# EAGLE board DanielKnapp-th (EAGLE 7.2.0)
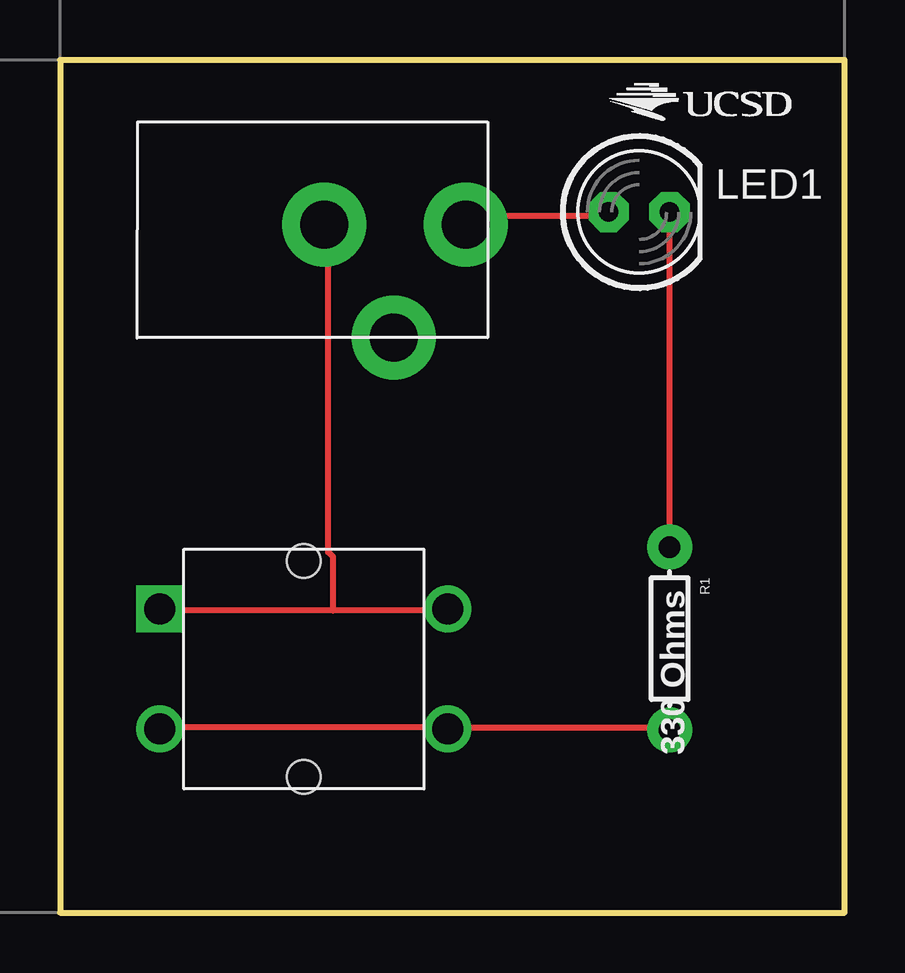
[diagram p0: board, top side]

Size 32.69 x 35.55 mm. Coordinates in mm from the lower left corner, seen from the top.
Outline: 0,0 32.69,0 32.69,35.55 0,35.55 0,0
Copper layers (1*16): Top 0.035559375mm / dielectric 1.501140625mm / Bottom 0.035559375mm
Design rules "4pcb-33board": minimum track width 10mil, minimum drill 15mil, track to track 6mil, track to pad 6mil, pad to pad 6mil, via to via 6mil, smd to smd 6mil, copper to edge 10mil, drill to drill 10mil, minimum pad ring 10mil, minimum via ring 8mil, stop-mask expansion 4mil, vias tented up to drill 0mil, thermal gap 10mil

## Footprints (pad centres in the part's own frame; a part is rotated, then mirrored left to right if it is on the bottom)
PJ-102A = drill 2 pad 3.5: RING -6.77,-4.345; RING_SW -3.87,-9.045; TIP -0.87,-4.345
LED5MM = drill 0.813 pad 1.676 octagon: A -1.27,0; K 1.27,0
AXIAL-0.3 = drill 0.9 pad 1.88: P$1 -3.81,0; P$2 3.81,0
BUTTON-TACTILE-SQUARE-ADAFRUIT1010 = drill 1.3 square: P -6,2.5 | drill 1.3: P2 6,2.5; S -6,-2.5; S2 6,-2.5 | hole 1.4: 0,4.5; 0,-4.5

## Placement (x,y rotation side)
J1  2.1MMJACKTHM  [PJ-102A]  17.78,33.02 0 top
LED1  Red  [LED5MM]  24.13,29.21 0 top
R1  330 Ohms  [AXIAL-0.3]  25.4,11.43 270 top
S1  BUTTON-TACTILE-SQUARE  [BUTTON-TACTILE-SQUARE-ADAFRUIT1010]  10.16,10.16 0 top
U$1  [UCSD_LOGO]  22.86,33.02 0 top

## Library data of the parts
J1 LED1 R1 = Lab2
S1 = DanielKnapp-Lab2
U$1 = Logos

## Nets
N$1: LED1.K R1.P$1
N$2: R1.P$2 S1.S S1.S2
N$3: J1.RING S1.P S1.P2
N$4: J1.TIP LED1.A

## Tracks (layer width: path | path; a pad name or v marks a point on that pad's centre or on a via)
N$1
  Top 0.254: R1.P$1 LED1.K
N$2
  Top 0.254: R1.P$2 25.4,7.72 16.26,7.72 S1.S2 16.05,7.72 4.27,7.72 S1.S
N$3
  Top 0.254: 11.38,12.6 16.05,12.6 S1.P2 | 11.38,12.6 4.27,12.6 S1.P | 11.38,12.6 11.38,14.83 11.18,15.04 11.18,28.65 J1.RING
N$4
  Top 0.254: LED1.A 22.76,29.06 17.27,29.06 17.07,28.85 J1.TIP